# Altium PCB eq.PcbDoc (part 2 of 2)
Units mil, origin at the board's own origin, x right, y up, seen from the top; angles counter-clockwise.
Board outline 5200 x 16200 mil, 2 copper layers (Top Layer, Bottom Layer); 220 components, 157 nets, 622 pads, 115 vias.
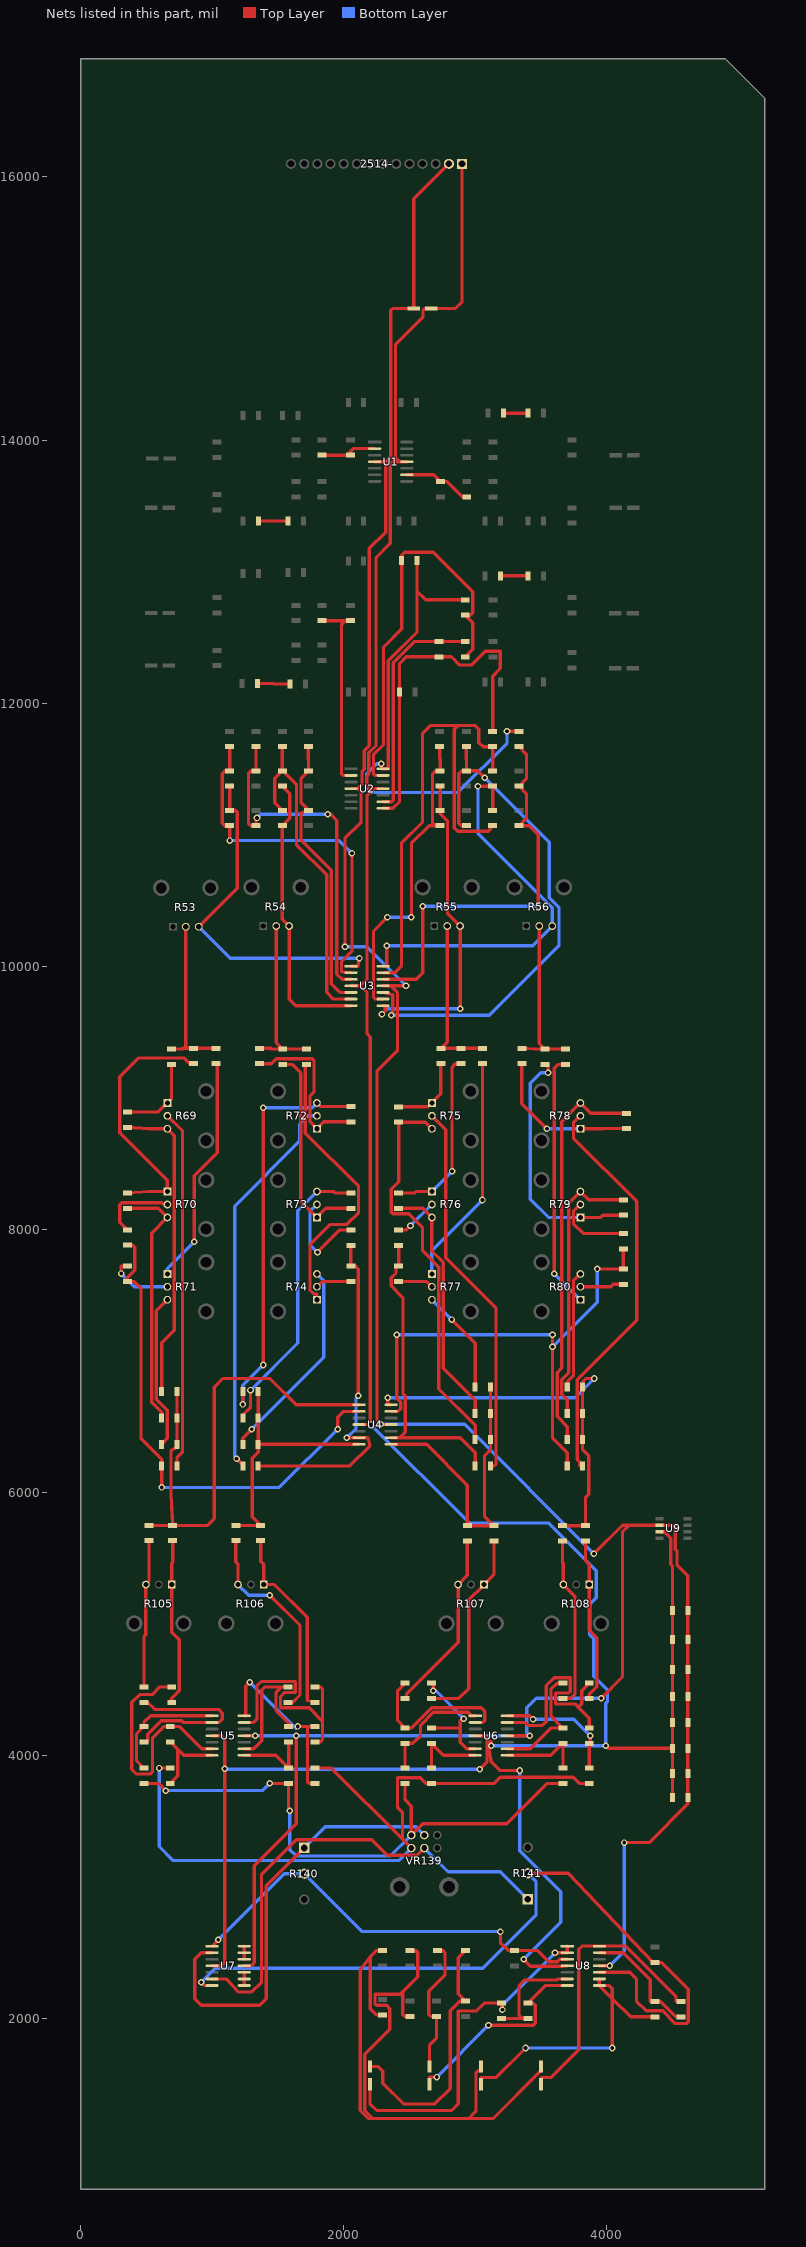
[diagram p2: the nets of this part, all layers, seen from the top]

## Via types
v1: diameter 50, hole 28, Top Layer to Bottom Layer, 115 vias

## Nets (pads, with @x,y where several pads share a name; then routed paths per layer and width w, separated by ;. In a path a pad name is that pad's centre, name@x,y a point inside that pad or via, vN(x,y) a via of type N, cw(c..) or ccw(c..) an arc to the next point about the centre after c; other vN are vias at no path point) (continued)
NetC28_2: C28.2 R35.2 R43.1 U2.8 | length 2685.6
  Top Layer w25: U2.8@2300,11200 2374.46,11200 2424.46,11250 C28.2@2424.46,12085 2424.46,12300 2476.02,12351.56 R35.2@2725.96,12351.56 2820,12351.56 2882.56,12289 2970,12289 3075,12394 3191,12394 3191,12263 3132.7,12204.7 R43.1@3132.7,11785
NetC29_1: C29.1 R28.1 R36.1 U2.13 | length 3091.3
  Top Layer w25: U2.13@2300,11450 2239,11450 2226.5,11462.5 2226.5,11607.48 2303,11683.98 2303,12426.31 2441,12564.31 C29.1@2441,13085 2441,13125.5 2462.5,13147 2680,13147 2981,12846 2981,12686.97 2962.5,12668.47 R36.1@2924.36,12668.47 2981,12611.83 2981,12408.2 R28.1@2924.36,12351.56
NetC29_2: C29.2 R36.2 R44.1 U2.14 | length 3833.7
  Top Layer w25: v1(2287,11538) 2287,11500 U2.14@2300,11500 2340,11500 2340,12321.5 2557.54,12539.03 2557.54,12850 ; C29.2@2557.54,13085 2557.54,12850 ; R36.2@2924.36,12785 2622.54,12785 2557.54,12850 ; v1(3242,11785) R44.1@3333.31,11785
  Bottom Layer w25: v1(2287,11538) 2250,11538 2174,11462 2174,11347 2200,11321 2867,11321 3242,11696 v1(3242,11785)
NetC32_2: C32.2 R38.2 R45.2 U3.3 | length 2682.3
  Top Layer w25: R38.2@1333.31,11668.46 C32.2@1333.31,11485 1298.5,11485 1276,11462.5 1276,11087.5 1295.04,11068.46 R45.2@1333.31,11068.46 1333.31,11119.31 v1(1341,11127) ; v1(1880,11155) 1901,11155 1948.5,11107.5 1948.5,9940 1988.5,9900 U3.3@2056,9900
  Bottom Layer w25: v1(1341,11127) 1369,11155 v1(1880,11155)
NetC33_2: C33.2 R40.2 R46.2 U3.5 | length 2163
  Top Layer w25: R40.2@1731.37,11668.46 1731.37,11576.94 1733.31,11575 C33.2@1733.31,11485 1676,11427.69 1676,11242.31 R46.2@1733.31,11185 1676,11162.5 1676,10958.7 1905.98,10728.71 1905.98,9865.02 1971,9800 U3.5@2056,9800
NetC34_2: C34.2 R42.2 R47.2 U3.10 | length 4094.5
  Top Layer w25: U3.10@2300,9800 2374,9783 2374,9640 v1(2361,9627) ; R42.2@2932.51,11668.46 2932.51,11576.79 2933.31,11576 C34.2@2933.31,11485 ; R47.2@2933.31,11068.46 2895.04,11068.46 2876,11087.5 2876,11462.5 2898.5,11485 C34.2@2933.31,11485 ; v1(3073,11432) 3020,11485 C34.2@2933.31,11485
  Bottom Layer w25: v1(2361,9627) 3107,9627 3638,10158 3638,10445.29 3562.5,10520.79 3562.5,10942.5 v1(3073,11432)
NetC35_2: C35.2 R44.2 R48.2 U3.12 | length 3119.7
  Top Layer w25: U3.12@2300,9900 2551,9900 2601,9950 v1(2601,10455) ; R44.2@3333.31,11668.46 3390,11611.77 3390,11425.16 C35.2@3333.31,11368.46 3390,11311.77 3390,11125.16 R48.2@3333.31,11068.46 3411.54,11068.46 3480,11000 v1(3480,10455)
  Bottom Layer w25: v1(2601,10455) v1(3480,10455)
NetC36_1: C36.1 R37.2 R49.1 U3.2 | length 2780.5
  Top Layer w25: v1(1133.31,10955) R49.1@1133.31,11068.46 1095.04,11068.46 1076,11087.5 1076,11462.5 1098.5,11485 C36.1@1133.31,11485 R37.2@1133.31,11668.46 ; U3.2@2056,9950 1983.5,9957.5 1983.5,10033 2063,10112.5 v1(2063,10859)
  Bottom Layer w25: v1(1133.31,10955) 1967,10955 v1(2063,10859)
NetC36_2: C36.2 R49.2 R53.3 U3.1 | length 2670.9
  Top Layer w25: R53.3@898.43,10300 1190,10591.57 1190,11170 1175,11185 R49.2@1133.31,11185 C36.2@1133.31,11368.46 ; U3.1@2056,10000 2107.5,10000 v1(2120,10060)
  Bottom Layer w25: R53.3@898.43,10300 1138.43,10060 v1(2120,10060)
NetC37_1: C37.1 R39.2 R50.1 U3.6 | length 2564
  Top Layer w25: R50.1@1533.31,11185 1476,11242.31 1476,11427.69 C37.1@1533.31,11485 ; R39.2@1533.31,11668.46 C37.1@1533.31,11485 ; U3.6@2056,9750 1921.44,9750 1870.98,9800.45 1870.98,10694.02 1641,10924 1641,11382 1538,11485 C37.1@1533.31,11485
NetC37_2: C37.2 R50.2 R54.3 U3.7 | length 2178.3
  Top Layer w25: C37.2@1533.31,11368.46 1590,11311.77 1590,11125.16 R50.2@1533.31,11068.46 1533.31,10356.85 R54.3@1585.43,10304.72 1585.43,9750 1635.43,9700 U3.7@2056,9700
NetC38_1: C38.1 R41.2 R51.1 U3.9 | length 2402.7
  Top Layer w25: U3.9@2300,9750 2239.5,9750 2227,9762.5 2227,10265 v1(2333,10371) ; v1(2515,10371) 2515,10933.46 2650,11068.46 2695.04,11068.46 ; R41.2@2729.88,11668.46 2729.88,11578.43 2733.31,11575 C38.1@2733.31,11485 2698.5,11485 2676,11462.5 2676,11087.5 2695.04,11068.46 ; R51.1@2733.31,11068.46 2695.04,11068.46
  Bottom Layer w25: v1(2333,10371) v1(2515,10371)
NetC38_2: C38.2 R51.2 R55.3 U3.8 | length 2458.6
  Top Layer w25: v1(2291,9635) 2316,9660 2316,9700 U3.8@2300,9700 ; C38.2@2733.31,11368.46 R51.2@2733.31,11185 2733.31,11159.69 2790,11103 2790,10400.16 R55.3@2885.43,10304.72 v1(2885.43,9675.4)
  Bottom Layer w25: v1(2291,9635) 2331.4,9675.4 v1(2885.43,9675.4)
NetC39_1: C39.1 R43.2 R52.1 U3.13 | length 3986.7
  Top Layer w25: U3.13@2300,9950 2389,9950 2439,10000 2439,10935 2600,11096 2600,11769 2660,11829 2870,11829 ; C39.1@3132.7,11485 R43.2@3132.7,11668.47 3059.53,11668.47 3028,11700 3028,11801 3000,11829 2870,11829 ; R52.1@3133.31,11068.46 3118,11068.46 3118,11044 3100,11026 2866,11026 2841,11051 2841,11800 2870,11829
NetC39_2: C39.2 R52.2 R56.3 U3.14 | length 3096
  Top Layer w25: U3.14@2300,10000 2327,10000 v1(2327,10156) ; v1(3021,11368.46) C39.2@3132.7,11368.46 3132.7,11276.6 3133.31,11276 R52.2@3133.31,11185
  Bottom Layer w25: v1(2327,10156) 3436.71,10156 R56.3@3585.43,10304.72 3585.43,10445.57 3021,11010 v1(3021,11368.46)
NetC40_1: C40.1 R57.2 R69.1 | length 638.4
  Top Layer w25: C40.1@355,8891.54 590.83,8891.54 R69.1@659.72,8960.43 690.38,8991.09 R57.2@690.38,9252.89
NetC40_2: C40.2 R69.3 R85.1 | length 2364.8
  Top Layer w25: C40.2@355,8775 518.42,8763.58 R69.3@659.72,8763.58 712,8711.31 712,7232.57 616.73,7137.3 R85.1@616.73,6765
NetC41_1: C41.1 R58.2 R70.1 | length 1964.4
  Top Layer w25: C41.1@355,8275 518.42,8286.42 R70.1@659.72,8286.42 659.72,8371.28 298,8733 298,9159 440,9301 788.46,9301 831,9258.46 R58.2@858.44,9258.46
NetC41_2: C41.2 R70.3 R86.1 | length 1939.1
  Top Layer w25: C41.2@355,8158.46 590.83,8158.46 R70.3@659.72,8089.57 540.14,7969.98 540.14,6683.86 616.73,6607.27 R86.1@616.73,6565
NetC42_1: C42.1 R60.2 R72.1 | length 1268.9
  Top Layer w25: R60.2@1360.08,9258.46 1449.46,9258.46 1486,9295 1762.5,9295 1775,9282.5 1775,9043.57 1744.43,9013 1744.43,8815.61 R72.1@1796.46,8763.58 1849.61,8816.73 C42.1@2055,8816.73
NetC42_2: C42.2 R72.3 R88.1 | length 3110.3
  Top Layer w25: v1(1233.19,6667.81) R88.1@1233.19,6765 ; v1(1389,6968) v1(1389,8924) ; R72.3@1796.46,8960.43 1823.62,8933.27 C42.2@2055,8933.27
  Bottom Layer w25: v1(1233.19,6667.81) 1233.19,6812.19 v1(1389,6968) ; v1(1389,8924) 1760.02,8924 R72.3@1796.46,8960.43
NetC43_1: C43.1 R61.2 R73.1 | length 1599.7
  Top Layer w25: R61.2@1536.8,9252.89 1608.11,9252.89 1673,9188 1673,8213.02 R73.1@1796.46,8089.57 1865.35,8158.46 C43.1@2055,8158.46
NetC43_2: C43.2 R73.3 R89.1 | length 2218
  Top Layer w25: R89.1@1233.19,6565 1233.19,6587.5 1292,6646.31 v1(1292,6777) ; R73.3@1796.46,8286.42 1926,8286.42 1937.42,8275 C43.2@2055,8275
  Bottom Layer w25: v1(1292,6777) 1650,7135 1650,8139.96 R73.3@1796.46,8286.42
NetC44_1: C44.1 R63.2 R75.1 | length 590.8
  Top Layer w25: C44.1@2418.53,8930.74 2641.03,8930.74 R75.1@2670.73,8960.43 2739.07,9028.78 R63.2@2739.07,9258.47
NetC44_2: C44.2 R75.3 R91.1 | length 3045.8
  Top Layer w25: R75.3@2670.73,8763.58 2620.1,8814.21 C44.2@2418.53,8814.21 2418,8814.21 2418,8360 2361.97,8303.97 2361.97,8129.9 2375,8116.87 2495.13,8116.87 2600,8012 2600,7835.22 2722.75,7712.46 2722.75,6785.25 3000,6508 R91.1@3000,6400
NetC45_1: C45.1 R64.2 R76.1 | length 1345.8
  Top Layer w25: C45.1@2418.53,8275 2538,8275 2549.42,8286.42 R76.1@2670.73,8286.42 ; v1(2824,8439.69) 2824,9232.47 2850,9258.47 R64.2@2892.56,9258.47
  Bottom Layer w25: R76.1@2670.73,8286.42 v1(2824,8439.69)
NetC45_2: C45.2 R76.3 R92.1 | length 1906.7
  Top Layer w25: C45.2@2418.53,8158.46 2601.83,8158.46 R76.3@2670.73,8089.57 2670.73,7834.49 2757.75,7747.46 2757.75,6942.25 3000,6700 R92.1@3000,6600
NetC46_1: C46.1 R66.2 R78.1 | length 1180.7
  Top Layer w25: R66.2@3355,9258.46 3355,8954 v1(3545.42,8763.58) ; R78.1@3799.87,8763.58 3975,8763.58 3976.42,8765 C46.1@4151.73,8765
  Bottom Layer w25: v1(3545.42,8763.58) R78.1@3799.87,8763.58
NetC46_2: C46.2 R78.3 R94.1 | length 3049.8
  Top Layer w25: R94.1@3700,6400 3700,6500 3623.4,6576.6 3623.4,6910.56 3658,6945.15 3658,8818.56 R78.3@3799.87,8960.43 3878.77,8881.54 C46.2@4151.73,8881.54
NetC47_1: C47.1 R67.2 R79.1 | length 1908.9
  Top Layer w25: R67.2@3529.69,9252.89 3554,9252.89 v1(3554,9190) ; R79.1@3799.87,8089.57 3954,8089.57 3971.17,8106.73 C47.1@4126.73,8106.73
  Bottom Layer w25: v1(3554,9190) 3500,9190 3419,9109 3419,8228 3557.43,8089.57 R79.1@3799.87,8089.57
NetC47_2: C47.2 R79.3 R95.1 | length 2115.3
  Top Layer w25: R95.1@3700,6600 3700,6701.85 3658.4,6743.44 3658.4,6856.56 3712,6910.15 3712,8198.54 R79.3@3799.87,8286.42 3863.02,8223.27 C47.2@4126.73,8223.27
NetC48_1: C48.1 R70.2 | length 588.5
  Top Layer w25: C48.1@355,7995.32 298,8052.32 298,8187.5 311.5,8201 616.99,8201 630,8187.99 R70.2@659.72,8187.99
NetC48_2: C48.2 C49.2 R81.1 U4.2 | length 3845
  Top Layer w25: C48.2@355,7878.79 395.71,7878.79 412,7862.5 412,7688 355,7631 C49.2@355,7602.17 409,7602.17 460,7551.17 460,6406.73 616.73,6250 R81.1@616.73,6200 v1(616.73,6037) ; v1(1955,6480) 1955,6570 2000,6615 U4.2@2116.73,6615
  Bottom Layer w25: v1(616.73,6037) 1512,6037 v1(1955,6480)
NetC49_1: C49.1 R71.2 | length 496.3
  Top Layer w25: v1(308,7663) 308,7718.7 C49.1@355,7718.7
  Bottom Layer w25: v1(308,7663) 408.99,7562.01 R71.2@659.72,7562.01
NetC50_1: C50.1 R73.2 | length 731.1
  Top Layer w25: v1(1801,7826) 1969.42,7994.42 C50.1@2055,7994.42
  Bottom Layer w25: R73.2@1796.46,8187.99 1744,8135.54 1744,7883 v1(1801,7826)
NetC50_2: C50.2 C51.2 R82.1 U4.6 | length 2681.9
  Top Layer w25: R82.1@1349.72,6200 2046,6200 2201,6355 2184,6415 U4.6@2116.73,6415 v1(2024,6415) ; C50.2@2055,7877.89 C51.2@2055,7718.7 2091,7718.7 2112,7697.7 v1(2112,6734)
  Bottom Layer w25: v1(2024,6415) 2094,6485 2094,6716 v1(2112,6734)
NetC51_1: C51.1 R74.2 | length 275.2
  Top Layer w25: R74.2@1796.46,7562.01 1836.61,7602.17 C51.1@2055,7602.17
NetC52_1: C52.1 R76.2 | length 332.4
  Top Layer w25: C52.1@2418.53,7994.42 2477.16,7994.42 v1(2508,8025.27)
  Bottom Layer w25: v1(2508,8025.27) R76.2@2670.73,8187.99
NetC52_2: C52.2 C53.2 R83.1 U4.9 | length 2347.2
  Top Layer w25: U4.9@2360.73,6415 2425,6415 ; C52.2@2418.53,7877.89 C53.2@2418.53,7718.7 2398,7718.7 2398,7666.76 2361.97,7630.73 2361.97,7569.03 2451,7480 2451,6749.73 2468.23,6732.5 2468.23,6458.23 2425,6415 ; R83.1@3000,6200 3000,6300 2885,6415 2425,6415
NetC53_1: C53.1 R77.2 | length 268.8
  Top Layer w25: C53.1@2418.53,7602.17 2630.57,7602.17 R77.2@2670.73,7562.01
NetC54_1: C54.1 R79.2 | length 578.6
  Top Layer w25: R79.2@3799.87,8187.99 3747,8135.12 3747,8041.5 3820.65,7967.85 C54.1@4126.73,7967.85
NetC54_2: C54.2 C55.2 R84.1 U4.13 | length 3968.7
  Top Layer w25: U4.13@2360.73,6615 2412.5,6615 2433.23,6635.73 2433.23,6684.77 2403,6715 v1(2403,7197) ; v1(3588,7197) v1(3588,7106) 3588,6412 3700,6300 R84.1@3700,6200 ; v1(3927,7698.06) C55.2@4126.73,7698.06 C54.2@4126.73,7851.31
  Bottom Layer w25: v1(2403,7197) v1(3588,7197) ; v1(3588,7106) 3927,7445 v1(3927,7698.06)
NetC55_1: C55.1 R80.2 | length 334.9
  Top Layer w25: R80.2@3799.87,7562.01 4030.46,7562.01 4049.98,7581.53 C55.1@4126.73,7581.53
NetC56_1: C56.1 R127.2 U8.1 U8.2 | length 2721.2
  Top Layer w25: C56.1@2200,1500 2200,1350 2250,1300 2821,1300 2871,1350 2871,2057 3010,2057 3069.54,2116.54 R127.2@3200,2116.54 3200,2072 v1(3207,2065) ; v1(3607,2500) U8.2@3700,2500 U8.1@3700,2550
  Bottom Layer w25: v1(3207,2065) 3207,2100 v1(3607,2500)
NetC56_2: C56.2 R131.2 R135.1 | length 2002.4
  Top Layer w25: C56.2@2200,1634 2263,1634 2297,1600 2297,1508 2455,1350 2693,1350 2810,1467 2810,2059 2882.03,2131.03 R135.1@2927.93,2131.03 2871,2187.96 2871,2459.6 R131.2@2927.93,2516.54
NetC57_1: C57.1 R128.2 U8.7 | length 1584
  Top Layer w25: C57.1@2652.87,1500 2652.87,1554 v1(2707,1554) ; v1(3101,1948) 3442.5,1948 3457,1962.5 3457,2100 3440.46,2116.54 R128.2@3400,2116.54 3533.46,2250 U8.7@3700,2250
  Bottom Layer w25: v1(2707,1554) v1(3101,1948)
NetC57_2: C57.2 R132.2 R136.1 | length 1050.7
  Top Layer w25: C57.2@2652.87,1634 2652.87,1798 2705.13,1850.26 R136.1@2705.13,2014.49 2662.5,2014.49 2648,2028.99 2648,2206.3 2770,2328.3 2770,2500 2753.46,2516.54 R132.2@2712.99,2516.54
NetC58_1: C58.1 R129.2 U8.8 U8.9 | length 2272.9
  Top Layer w25: C58.1@3044.82,1500 3044.82,1550 3158,1550 v1(3383,1775) ; U8.9@3944,2300 U8.8@3944,2250 ; v1(4043,1775) 4043,2151 ; R129.2@4367.74,2012.42 4181.58,2012.42 4043,2151 ; U8.8@3944,2250 4043,2151 ; U8.8@3944,2250 4018,2250 4043,2225 4043,2151
  Bottom Layer w25: v1(3383,1775) v1(4043,1775)
NetC58_2: C58.2 R133.2 R137.1 | length 3212.8
  Top Layer w25: R137.1@2505.65,2014.49 2462.5,2014.49 2449,2027.99 2449,2203 ; R133.2@2505.65,2516.54 2542,2516.54 ; C58.2@3044.82,1634 3044.82,1603 3021.5,1603 3006,1587.5 3006,1295 2950,1239 2222,1239 2161,1300 2161,1727 2351,1917 2351,2075 2326,2100 2250.22,2100 2237.72,2112.5 2237.72,2184 2430,2184 2449,2203 ; 2449,2203 2563,2317 2563,2495.54 ; 2542,2516.54 2550,2516.54 2563,2503.54 2563,2495.54 ; 2542,2516.54 2563,2495.54
NetC59_1: C59.1 R130.2 U8.14 | length 2173.7
  Top Layer w25: C59.1@3500,1500 3500,1551.5 3578.5,1551.5 3787,1760 3787,2525 3812,2550 U8.14@3944,2550 4144,2550 4526,2168 4526,2128.96 R130.2@4563.26,2128.96
NetC59_2: C59.2 R134.2 R138.1 | length 3394.9
  Top Layer w25: R138.1@2294.28,2025.61 2250,2025.61 2202.72,2072.89 2202.72,2469.26 ; R134.2@2294.28,2516.54 2250,2516.54 2202.72,2469.26 ; C59.2@3500,1634 3500,1603 3136,1239 2187,1239 2126,1300 2126,2369 2202.72,2469.26
NetR10_2: R10.2 R18.1 | length 225.2
  Top Layer w25: R10.2@1352.54,13385 R18.1@1577.73,13385
NetR12_2: R12.2 R20.1 | length 188.4
  Top Layer w25: R20.1@3213.82,14203.88 R12.2@3402.2,14203.88
NetR14_2: R14.2 R22.1 | length 249.1
  Top Layer w25: R14.2@1343.97,12149.22 1466,12149.22 1469.49,12145.73 R22.1@1591.65,12145.73
NetR16_2: R16.2 R24.1 | length 209.5
  Top Layer w25: R24.1@3192.69,12967.84 R16.2@3402.2,12967.84
NetR25_2: R25.2 R29.1 U1.2 | length 436.8
  Top Layer w25: R25.2@1836,13885 R29.1@2050.96,13885 2050.96,13912.5 2073.46,13935 U1.2@2236,13935
NetR26_2: R26.2 R31.1 U1.9 | length 525
  Top Layer w25: U1.9@2480,13735 2686,13735 R31.1@2736,13685 2783.46,13685 2900,13568.46 R26.2@2936,13568.46
NetR27_2: R27.2 R33.1 U2.2 | length 1469.8
  Top Layer w25: R27.2@1836,12626.73 2013,12626.73 ; R33.1@2050.96,12626.73 2013,12626.73 ; U2.2@2056,11450 1995.5,11450 1983,11462.5 1983,12596.73 2013,12626.73
NetR28_2: R28.2 R35.1 U2.9 | length 1741.6
  Top Layer w25: U2.9@2300,11250 2365,11250 2377,11262 2377,12308 2537.09,12468.09 R35.1@2725.96,12468.09 2825,12468.09 R28.2@2924.36,12468.09
NetR53_2: R53.2 R57.1 R58.1 R59.1 | length 1272
  Top Layer w25: R57.1@690.38,9369.42 771,9369.42 776.58,9375 812.5,9375 ; R53.2@800,10300 800,9387.5 812.5,9375 ; R59.1@1029.88,9375 R58.1@858.44,9375 812.5,9375
NetR54_2: R54.2 R60.1 R61.1 R62.1 | length 1316.3
  Top Layer w25: R60.1@1360.08,9375 1445,9375 1450.58,9369.42 R61.1@1536.8,9369.42 ; R54.2@1487.01,10304.72 1487.01,9419.22 R61.1@1536.8,9369.42 ; R62.1@1718.18,9369.42 R61.1@1536.8,9369.42
NetR55_2: R55.2 R63.1 R64.1 R65.1 | length 1265.5
  Top Layer w25: R55.2@2787.01,10304.72 2787.01,9422.93 R63.1@2739.07,9375 R64.1@2892.56,9375 R65.1@3055,9375
NetR56_2: R56.2 R66.1 R67.1 R68.1 | length 1286
  Top Layer w25: R66.1@3355,9375 3447.58,9369.42 R67.1@3529.69,9369.42 ; R56.2@3487.01,10304.72 3487.01,9412.1 R67.1@3529.69,9369.42 ; R68.1@3687.81,9369.42 3608,9369.42 R67.1@3529.69,9369.42
NetR59_2: R59.2 R71.1 | length 1765.7
  Top Layer w25: v1(865,7904) 865,8408 1040,8583 1040,9258.46 R59.2@1029.88,9258.46
  Bottom Layer w25: R71.1@659.72,7660.43 659.72,7698.72 v1(865,7904)
NetR62_2: R62.2 R74.1 | length 2225.8
  Top Layer w25: R62.2@1718.18,9252.89 1709,9252.89 1709,8729 2113,8325 2113,8125 2024.14,8036.14 1899.83,8036.14 1744,7880.31 1744,7538 1775,7507 1796.46,7507 R74.1@1796.46,7463.58
NetR65_2: R65.2 R77.1 | length 1757.2
  Top Layer w25: v1(3055,8222) R65.2@3055,9258.46
  Bottom Layer w25: R77.1@2670.73,7660.43 2670.73,7837.73 v1(3055,8222)
NetR68_2: R68.2 R80.1 | length 1940.7
  Top Layer w25: v1(3602,7661.46) 3602,9225 3629.89,9252.89 R68.2@3687.81,9252.89
  Bottom Layer w25: v1(3602,7661.46) R80.1@3799.87,7463.58
NetR69_2: R69.2 R81.2 | length 2727
  Top Layer w25: R69.2@659.72,8862.01 775,8746.73 775,6308 733.27,6266.27 R81.2@733.27,6200
NetR71_3: R71.3 R87.1 | length 1185.9
  Top Layer w25: R87.1@616.73,6365 616.73,6367 659,6409.27 659,6624.58 575.14,6708.44 575.14,7378.99 R71.3@659.72,7463.58
NetR72_2: R72.2 R82.2 | length 2985.4
  Top Layer w25: v1(1186,6255.19) 1233.19,6208 R82.2@1233.19,6200
  Bottom Layer w25: v1(1186,6255.19) 1172.15,6269.03 1172.15,8176.15 1667,8671 1667,8800 1729.01,8862.01 R72.2@1796.46,8862.01
NetR74_3: R74.3 R90.1 | length 1572.3
  Top Layer w25: R90.1@1233.19,6365 1233.19,6410.19 v1(1302,6479)
  Bottom Layer w25: v1(1302,6479) 1849,7026 1849,7607.89 R74.3@1796.46,7660.43
NetR75_2: R75.2 R83.2 | length 2899.4
  Top Layer w25: R75.2@2670.73,8862.01 2776,8756.73 2776,7782.46 3159,7399.46 3159,6212.5 3146.5,6200 R83.2@3116.54,6200
NetR77_3: R77.3 R93.1 | length 800
  Top Layer w25: v1(2821,7313.31) 3000,7134.31 R93.1@3000,6800
  Bottom Layer w25: R77.3@2670.73,7463.58 v1(2821,7313.31)
NetR78_2: R78.2 R84.2 | length 3102.7
  Top Layer w25: R78.2@3799.87,8862.01 3747,8809.13 3747,8693 4229,8211 4229,7309 3774.94,6854.94 3774.94,6249.06 3793,6231 3793,6200 R84.2@3816.54,6200
NetR80_3: R80.3 R96.1 | length 901.8
  Top Layer w25: R96.1@3700,6800 3700,6839 3747,6886 3747,7607.56 R80.3@3799.87,7660.43
NetR85_2: R85.2 R86.2 R87.2 R97.1 R98.1 U4.1 | length 3772.4
  Top Layer w25: R97.1@520,5748.27 R98.1@700.04,5748.27 ; R85.2@733.27,6765 R86.2@733.27,6565 R87.2@733.27,6365 733.27,6343.44 687,6317.94 687,5980.04 R98.1@700.04,5748.27 ; U4.1@2116.73,6665 1639,6665 1439,6865 1082,6865 1017,6800 1017,5800 965.27,5748.27 R98.1@700.04,5748.27
NetR88_2: R88.2 R89.2 R90.2 R99.1 R100.1 U4.7 | length 2019.3
  Top Layer w25: R99.1@1179.81,5748.27 R100.1@1369.37,5748.27 1304,5813.63 1304,6259 1349.72,6304.72 R90.2@1349.72,6365 ; R88.2@1349.72,6765 R89.2@1349.72,6565 R90.2@1349.72,6365 ; U4.7@2116.73,6365 R90.2@1349.72,6365
NetR91_2: R91.2 R92.2 R93.2 R101.1 R102.1 U4.8 | length 2321.7
  Top Layer w25: U4.8@2360.73,6365 2630,6365 2940,6055 2940,5746.57 R101.1@2940.55,5746.57 R102.1@3142.74,5746.57 3070,5819.31 3070,6276 3116.54,6322.54 R91.2@3116.54,6400 R92.2@3116.54,6600 R93.2@3116.54,6800
NetR94_2: R94.2 R95.2 R96.2 R103.1 R104.1 U4.14 | length 3105.2
  Top Layer w25: v1(2336,6719) 2336,6665 U4.14@2360.73,6665 ; R103.1@3663.62,5746.56 3751,5746.56 R104.1@3839.37,5746.57 3839.37,5961.37 3863,5985 3863,6276.54 3816.54,6323 R94.2@3816.54,6400 R95.2@3816.54,6600 R96.2@3816.54,6800 3816.54,6840 3841.54,6865 v1(3905,6865)
  Bottom Layer w25: v1(2336,6719) 3759,6719 v1(3905,6865)
NetR97_2: R97.2 R105.3 R142.1 | length 1127.8
  Top Layer w25: R142.1@481.73,4519.8 481.73,4901 496.3,4915.57 R105.3@496.3,5298.54 520,5322.24 R97.2@520,5631.73
NetR98_2: R98.2 R105.1 R143.1 | length 1278.4
  Top Layer w25: R143.1@693.15,4403.27 693.15,4433.15 750,4490 750,4880.15 693.15,4937 R105.1@693.15,5298.54 693.15,5461 700.04,5467.89 R98.2@700.04,5631.73
NetR99_2: R99.2 R106.3 R144.1 | length 1584.1
  Top Layer w25: R99.2@1179.81,5631.73 1179.81,5472.49 1196.3,5456 R106.3@1196.3,5298.54 ; v1(1438,5218) 1668.05,4987.95 1668.05,4458.81 1612.5,4403.27 R144.1@1576.49,4403.27
  Bottom Layer w25: R106.3@1196.3,5298.54 1276.84,5218 v1(1438,5218)
NetR100_2: R100.2 R106.1 R145.1 | length 1468.6
  Top Layer w25: R100.2@1369.37,5631.73 1369.37,5476.78 1393.15,5453 R106.1@1393.15,5298.54 1474.18,5298.54 1723.96,5048.76 1723.96,4416.8 R145.1@1781.73,4403.27
NetR101_2: R101.2 R107.3 R146.1 | length 1399.5
  Top Layer w25: R146.1@2467.17,4432.41 2477,4432.41 2477,4465 2870.32,4858.32 R107.3@2870.32,5298.54 2940.55,5368.78 R101.2@2940.55,5630.03
NetR102_2: R102.2 R107.1 R147.1 | length 1517.2
  Top Layer w25: R147.1@2667.17,4432.41 2876.41,4432.41 2951,4507 2951,5182.38 R107.1@3067.17,5298.54 3142.74,5374.12 R102.2@3142.74,5630.03
NetR103_2: R103.2 R108.3 R148.1 | length 1308.8
  Top Layer w25: R103.2@3663.62,5630.03 3663.62,5466.7 3670.32,5460 R108.3@3670.32,5298.54 3758.72,5210.14 3758.72,4466.13 3725,4432.41 R148.1@3667.17,4432.41
NetR104_2: R104.2 R108.1 R149.1 | length 1256.2
  Top Layer w25: R104.2@3839.37,5630.03 3839.37,5477.79 3867.17,5450 R108.1@3867.17,5298.54 3867.17,4952 3924,4895.17 3924,4520 3867.17,4463.17 R149.1@3867.17,4432.41
NetR109_1: R109.1 R142.2 U5.2 | length 1388.3
  Top Layer w25: R109.1@481.73,4103.27 510,4103.27 510,4161 612,4263 768,4263 781,4250 U5.2@1000,4250 1053,4250 1078,4275 1078,4321 1050,4349 563,4349 508.73,4403.27 R142.2@481.73,4403.27
NetR109_2: R109.2 R117.1 U5.1 | length 932.7
  Top Layer w25: R117.1@481.73,3903.27 425,3960 425,4163.07 R109.2@481.73,4219.8 481.73,4250 531.73,4300 U5.1@1000,4300
NetR110_1: R110.1 R143.2 U5.6 | length 1855.6
  Top Layer w25: R143.2@693.15,4519.8 603,4519.8 545.2,4462 450,4462 390,4402 390,3893 425,3858 529,3858 546,3875 546,4131 634.8,4219.8 R110.1@681.73,4219.8 750,4219.8 919.8,4050 U5.6@1000,4050
NetR110_2: R110.2 R118.1 U5.7 | length 644
  Top Layer w25: R118.1@681.73,3786.73 739,3844 739,4046 ; R110.2@681.73,4103.27 739,4046 ; U5.7@1000,4000 785,4000 739,4046
NetR111_1: R111.1 R144.2 U5.9 | length 1110
  Top Layer w25: U5.9@1244,4050 1315,4050 1376.5,4111.5 1376.5,4494.39 1401.91,4519.8 1529.74,4519.8 ; R144.2@1576.49,4519.8 1529.74,4519.8 ; R111.1@1581.73,4219.8 1581.73,4244.94 1484.93,4341.74 1484.93,4475 1529.74,4519.8
NetR111_2: R111.2 R119.1 U5.8 | length 577.8
  Top Layer w25: U5.8@1244,4000 1485,4000 R119.1@1581.73,3903.27 R111.2@1581.73,4103.27
NetR112_1: R112.1 R145.2 U5.13 | length 1834.7
  Top Layer w25: U5.13@1244,4250 1316,4250 1341,4275 1341,4527.4 1375,4561.4 1633.05,4561.4 1633.05,4478 1553.07,4478 1519.93,4444.86 1519.93,4361.67 1738.33,4361.67 1839,4261 ; R112.1@1781.73,4103.27 1825,4103.27 1839,4117.27 1839,4261 ; R145.2@1781.73,4519.8 1825,4519.8 1839,4505.8 1839,4261
NetR112_2: R112.2 R120.1 U5.14 | length 1413.9
  Top Layer w25: U5.14@1244,4300 1255,4300 1255,4525 1285,4555 v1(1286,4555) ; v1(1650.8,4219.8) 1737.5,4219.8 ; R120.1@1781.73,3786.73 1737.5,3786.73 1725,3799.23 1725,4207.3 1737.5,4219.8 ; R112.2@1781.73,4219.8 1737.5,4219.8
  Bottom Layer w25: v1(1286,4555) 1636,4205 v1(1650.8,4219.8)
NetR113_1: R113.1 R146.2 U6.2 | length 1219.6
  Top Layer w25: R146.2@2467.17,4548.94 2410,4491.78 2410,4264.93 R113.1@2467.17,4207.77 2514,4207.77 2668.01,4361.78 3047.22,4361.78 3073,4336 3073,4264 3059,4250 U6.2@3000,4250
NetR113_2: R113.2 R121.1 U6.1 | length 883.2
  Top Layer w25: R121.1@2467.17,3903.27 R113.2@2467.17,4091.23 2526.22,4091.23 2584.98,4150 2584.98,4229.25 2682.51,4326.78 2947.07,4326.78 2961.35,4312.5 2961.35,4300 U6.1@3000,4300
NetR114_1: R114.1 R147.2 U6.6 | length 943.9
  Top Layer w25: R114.1@2667.17,4207.77 2887,4207.77 ; R147.2@2667.17,4548.94 2682,4548.94 v1(2682,4491) ; v1(2914,4279) 2901,4279 2887,4265 2887,4207.77 ; U6.6@3000,4050 2937,4050 2887,4100 2887,4207.77
  Bottom Layer w25: v1(2682,4491) 2702,4491 v1(2914,4279)
NetR114_2: R114.2 R122.1 U6.7 | length 558.6
  Top Layer w25: R122.1@2667.17,3903.27 R114.2@2667.17,4091.23 2758.4,4000 U6.7@3000,4000
NetR115_1: R115.1 R148.2 U6.9 | length 931.8
  Top Layer w25: U6.9@3244,4050 3418.23,4050 3576,4207.77 R115.1@3667.17,4207.77 3575.61,4299.32 3575.61,4502.16 3622.39,4548.94 R148.2@3667.17,4548.94
NetR115_2: R115.2 R123.1 U6.8 | length 648.9
  Top Layer w25: U6.8@3244,4000 3575.93,4000 R115.2@3667.17,4091.23 R123.1@3667.17,3903.27
NetR116_1: R116.1 R149.2 U6.13 | length 1701.3
  Top Layer w25: U6.13@3244,4250 3376.12,4250 3399,4227.12 3510.12,4227.12 3540,4257 3540,4531 3600,4591 3723.72,4591 3723.72,4485.17 3712.56,4474 3610.61,4474 3610.61,4390.81 3759,4390.81 3784.5,4365.31 ; R116.1@3867.17,4207.77 3867.17,4282.64 3784.5,4365.31 ; R149.2@3867.17,4548.94 3810,4491.78 3810,4390.81 3784.5,4365.31
NetR116_2: R116.2 R124.1 U6.14 | length 947.7
  Top Layer w25: U6.14@3244,4300 3415,4300 v1(3440,4275) ; R124.1@3867.17,3903.27 R116.2@3867.17,4091.23 3875,4091.23 v1(3875,4150)
  Bottom Layer w25: v1(3440,4275) 3750,4275 v1(3875,4150)
NetR117_2: R117.2 R119.2 R121.2 R123.2 VR139.A3 | length 4390.2
  Top Layer w25: R117.2@481.73,3786.73 593.27,3786.73 v1(648,3732) ; v1(1437,3786.73) R119.2@1581,3786.73 ; R119.2@1581.73,3786.73 R119.2@1581,3786.73 ; v1(1591,3578) 1581,3588 R119.2@1581,3786.73 ; R121.2@2467.17,3786.73 2467.17,3660.8 2514.57,3613.4 VR139.A3@2514.57,3393.7 2600.87,3480 3241.27,3480 3548,3786.73 R123.2@3667.17,3786.73
  Bottom Layer w25: v1(648,3732) 1382.27,3732 v1(1437,3786.73) ; v1(1591,3578) 1591,3282.89 1638.52,3235.37 2356.24,3235.37 VR139.A3@2514.57,3393.7
NetR118_2: R118.2 R120.2 R122.2 R124.2 VR139.B3 | length 5660.6
  Top Layer w25: v1(598,3903.27) R118.2@681.73,3903.27 ; R120.2@1781.73,3903.27 1906.57,3903.27 2448,3361.84 ; VR139.B3@2514.57,3295.28 2448,3361.84 ; R124.2@3867.17,3786.73 3790.27,3786.73 3744,3833 3190.27,3833 3144,3786.73 R122.2@2667.17,3786.73 2625,3786.73 2582.73,3829 2410,3829 2410,3602 2448,3564 2448,3361.84
  Bottom Layer w25: v1(598,3903.27) 598,3307 704.63,3200.37 2419.66,3200.37 VR139.B3@2514.57,3295.28
NetR125_2: R125.2 R140.2 U7.1 U8.3 | length 3262.2
  Top Layer w25: U7.1@1000,2550 v1(1047,2597) ; v1(3192,2660) 3192,2574.54 3250,2516.54 R125.2@3300,2516.54 3473.06,2516.54 3557.76,2431.84 3624,2431.84 3642.16,2450 U8.3@3700,2450
  Bottom Layer w25: v1(1047,2597) 1550,3100 R140.2@1700,3100 2140,2660 v1(3192,2660)
NetR126_2: R126.2 R141.2 U7.7 U8.10 | length 5977.3
  Top Layer w25: v1(917,2276) 943,2250 U7.7@1000,2250 ; R141.2@3400,3103.15 3708.03,3103.15 4355.14,2424.79 R126.2@4367.73,2424.79 4418.21,2424.79 4620,2223 4620,1975 4606,1961 4522,1961 4425,2058 4300,2058 4226,2132 4226,2300 4176,2350 U8.10@3944,2350
  Bottom Layer w25: v1(917,2276) 1022,2381 3059,2381 3462,2784 3462,3041.15 R141.2@3400,3103.15
NetR127_1: R127.1 R128.1 U8.6 | length 848.1
  Top Layer w25: R127.1@3200,2000 3358,2000 ; R128.1@3400,2000 3358,2000 ; U8.6@3700,2300 3630.53,2300 3622,2291.47 3374.47,2291.47 3333,2250 3333,2025 3358,2000
NetR129_1: R129.1 R130.1 U8.13 | length 917.9
  Top Layer w25: U8.13@3944,2500 4126,2500 4332,2294 4332,2128.96 R129.1@4367.74,2128.96 4407,2128.96 4523.54,2012.42 R130.1@4563.26,2012.42
NetR140_1: R140.1 U7.2 VR139.A2 | length 3307.8
  Top Layer w25: U7.2@1000,2500 919,2500 869,2450 869,2150 919,2100 1360.5,2100 1410.5,2150 1410.5,3007.35 R140.1@1700,3296.85
  Bottom Layer w25: R140.1@1700,3296.85 1861.15,3458 2548.69,3458 VR139.A2@2612.99,3393.7
NetR141_1: R141.1 U7.6 VR139.B2 | length 3635.4
  Top Layer w25: U7.6@1000,2300 1109.5,2300 1200,2201 1300,2201 1375.5,2276.5 1375.5,3094.83 1639,3358.33 2213.67,3358.33 2332,3240 2557.72,3240 VR139.B2@2612.99,3295.28
  Bottom Layer w25: VR139.B2@2612.99,3295.28 2793.27,3115 3191.3,3115 R141.1@3400,2906.3
opamp5gnd: 2514-.2 C1.1 C10.1 C11.1 C12.1 C21.1 C30.1 C31.1 C60.2 C61.1 U1.4 U2.4 U3.11 U4.11 U5.11 U6.11 U7.11 U8.11 U9.2 | length 23938
  Top Layer w25: U7.11@1244,2400 1296,2400 1321,2425 1321,3162.17 1639,3480.17 v1(1639,4150) ; U5.11@1244,4150 v1(1329,4150) ; v1(2010,10147) 2010,10973 2132,11095 2132,11325 2107,11350 ; U2.4@2056,11350 2107,11350 ; U1.4@2236,13835 2300,13835 ; v1(2282,6517) v1@2284,6519 ; U3.11@2300,9850 2359,9850 ; v1(2474,9850) 2359,9850 ; 2514-.2@2800,16100 2533,15833 C60.2@2533,15000 2373,15000 2359,14986 2359,13874.21 2319.79,13835 2300,13835 ; U6.11@3244,4150 3392,4150 v1(3416,4150) ; v1(3903,5533) 4120,5750 4170,5750 ; U8.11@3944,2400 v1(4022,2400) ; v1(3959,4435) 4120,4596 4120,5700 4170,5750 ; v1(4134,3337) 4323,3337 4616.53,3630.53 C31.1@4616.53,3680.75 C30.1@4616.53,3861.72 4616.53,3957 C21.1@4616.54,4053.2 4616.54,4150 C12.1@4616.53,4248.65 4616.53,4348 C11.1@4616.54,4447.37 C10.1@4616.54,4651.27 C1.1@4616.54,4881.89 C61.1@4616.54,5100 4616.54,5367.05 4533.59,5450 4533.59,5555.41 4522,5567 4522,5735 4507,5750 U9.2@4400,5750 4170,5750 ; 2107,11350 2139,11382 2139,11479.48 2156.5,11496.98 2156.5,11638.13 2195.5,11677.13 2195.5,13175.5 2320,13300 2320,13815 2300,13835 ; v1@2284,6519 2288,6515 U4.11@2360.73,6515 v1@2284,6519 ; v1@2284,6519 2253,6550 2253,9201 2409,9357 2409,9800 2359,9850
  Bottom Layer w25: v1(1329,4150) v1(1639,4150) v1@3392,4150 ; v1(2010,10147) 2177,10147 v1(2474,9850) ; v1(2282,6517) 2919,6517 v1(3903,5533) ; v1(3416,4150) v1@3392,4150 ; v1(3959,4435) 3466,4435 3392,4361 v1@3392,4150 ; v1(4022,2400) 4134,2512 v1(4134,3337)
opamp5vcc: 2514-.1 C1.2 C10.2 C11.2 C12.2 C21.2 C30.2 C31.2 C60.1 C61.2 U1.11 U2.11 U3.4 U4.4 U5.4 U6.4 U7.4 U8.4 U9.3 | length 24388
  Top Layer w25: U7.4@1000,2400 1070,2400 1095,2425 v1(1095,3898) 1095,4125 1070,4150 U5.4@1000,4150 ; U3.4@2056,9850 2128,9850 ; v1(2206,6515) U4.4@2116.73,6515 2203,6518 2203,9460.5 2178,9485.5 2178,9800 2128,9850 ; U2.11@2300,11350 2228,11350 ; U1.11@2480,13835 2425,13835 ; 2514-.1@2900,16100 2900,15050 2850,15000 C60.1@2667,15000 2615.5,15000 2603,14987.5 2603,14934 2394,14725 2394,13866 2425,13835 ; U6.4@3000,4150 3065,4150 ; v1(3034,3894) 3090,3950 3090,4125 ; v1(3122,4072) 3122,4100 3072,4150 3065,4150 ; v1(3338,3885) 3187,3885 3122,3950 3100.41,4068.05 3090,4125 ; v1(3368,2449) 3420.16,2396.84 3666.44,2396.84 U8.4@3700,2400 ; v1(3993,4072) 4012,4053 C21.2@4500,4053 ; U9.3@4400,5700 4437,5700 4487,5650 4487,5453 4500,5440 C61.2@4500,5100 C1.2@4500,4881.89 C10.2@4500,4651.27 C11.2@4500,4447.37 C12.2@4500,4248.65 C21.2@4500,4053.2 C21.2@4500,4053 ; C31.2@4500,3680.75 C30.2@4500,3861.72 C21.2@4500,4053 ; 2128,9850 2178,9900 2178,11300 2228,11350 ; 2228,11350 2199.5,11350 2174.5,11375 2174.5,11444.98 2191.5,11461.98 2191.5,11622.25 2246,11676.75 2246,13105 2355,13214 2355,13820 2370,13835 2425,13835 ; 3065,4150 3090,4125
  Bottom Layer w25: v1(1095,3898) 1099,3894 v1(3034,3894) ; v1(2206,6515) 2954,5767 3555,5767 3920,5402 3920,5198 3870,5148 3870,4918 3901,4887 3901,4600 4006.5,4494.5 4006.5,4411 3993,4397.5 v1(3993,4072) v1(3122,4072) ; v1(3338,3885) 3338,3275 3650,2963 3650,2731 v1(3368,2449)
Unused_parts_COMMON: U7.8 U7.9 U7.10 | length 100
  Top Layer w25: U7.8@1244,2250 U7.9@1244,2300 U7.10@1244,2350
Unused_parts_COMMON2: U7.12 U7.13 U7.14 | length 100
  Top Layer w25: U7.12@1244,2450 U7.13@1244,2500 U7.14@1244,2550
pads on no net: R53.MH1 R53.MH2 R54.MH1 R54.MH2 R55.MH1 R55.MH2 R56.MH1 R56.MH2 R69.MH1 R69.MH2 R70.MH1 R70.MH2 R71.MH1 R71.MH2 R72.MH1 R72.MH2 R73.MH1 R73.MH2 R74.MH1 R74.MH2 R75.MH1 R75.MH2 R76.MH1 R76.MH2 R77.MH1 R77.MH2 R78.MH1 R78.MH2 R79.MH1 R79.MH2 R80.MH1 R80.MH2 R105.MH1 R105.MH2 R106.MH1 R106.MH2 R107.MH1 R107.MH2 R108.MH1 R108.MH2 R140.3 R141.3 U9.4 U9.5 U9.6 U9.7 U9.8 VR139.MH1 VR139.MH2